# EAGLE board servo_controller (EAGLE 6.4)
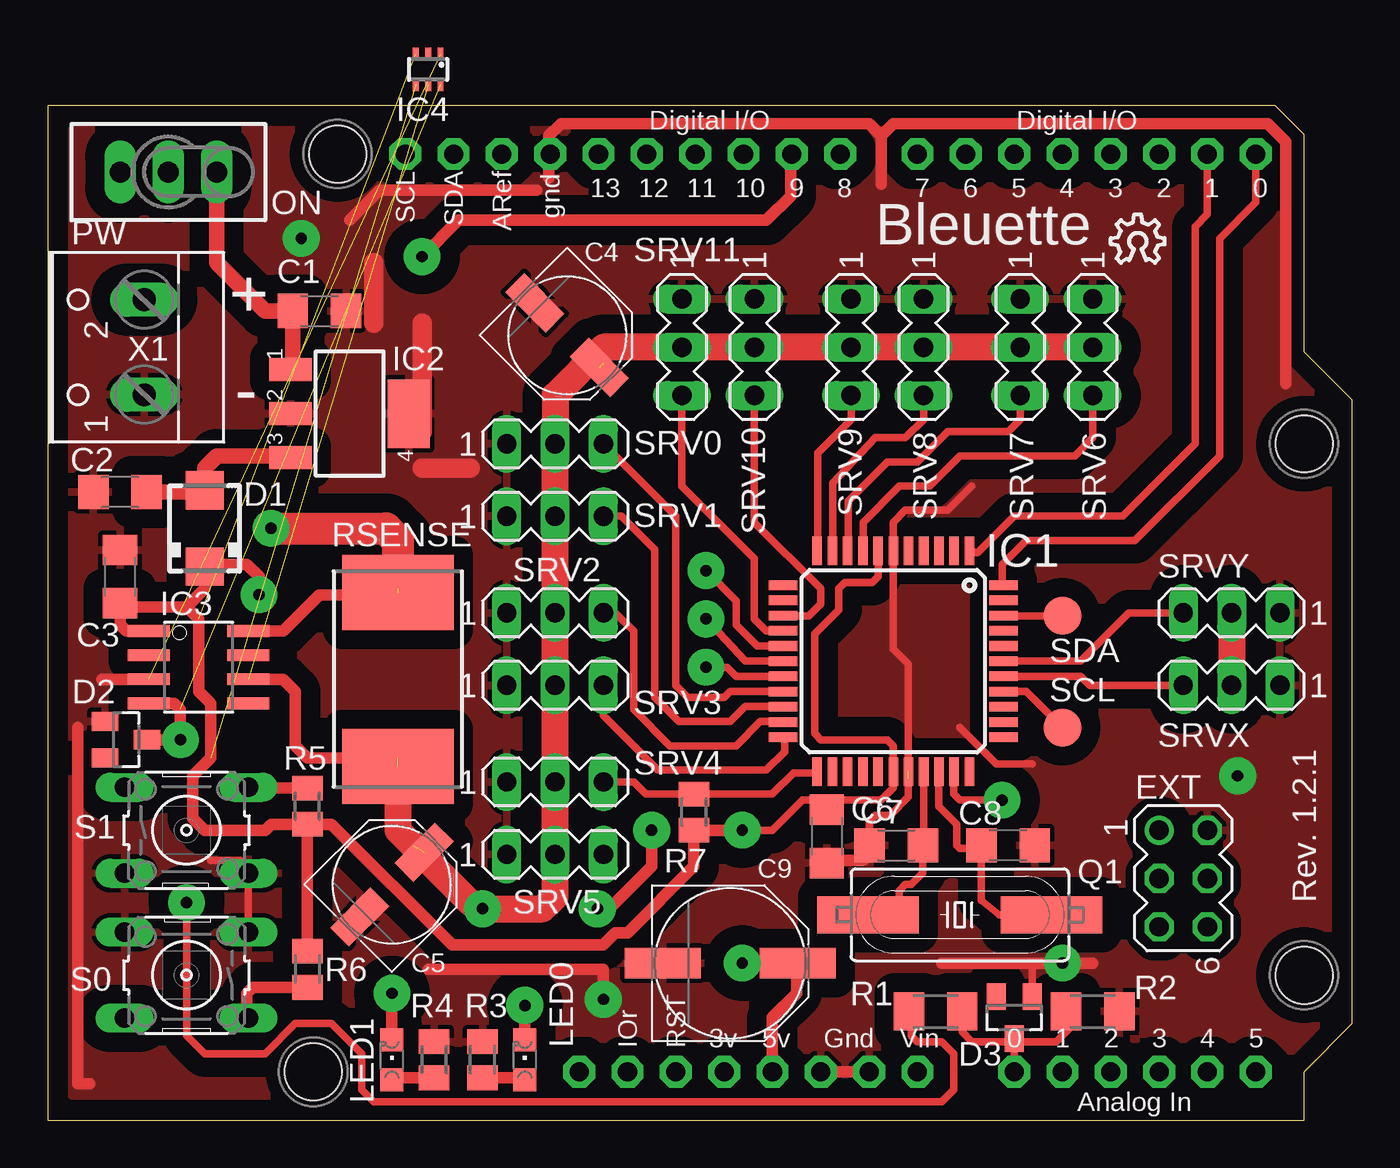
[diagram p0: board, top side]
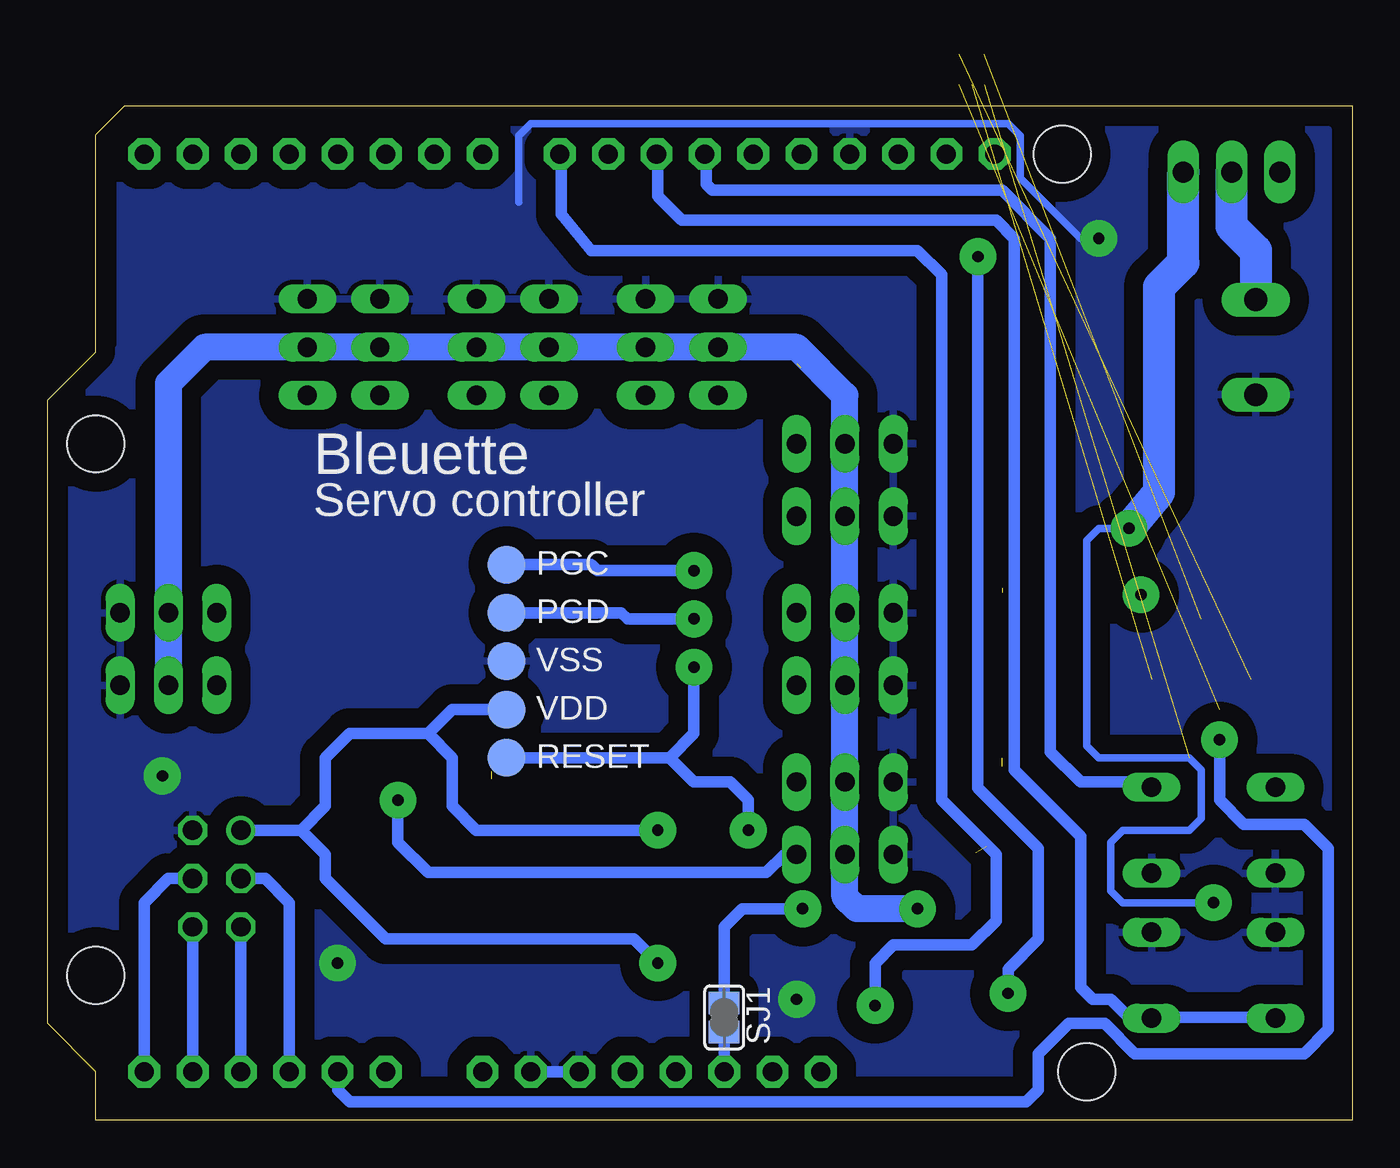
[diagram p1: board, bottom side, seen from below]

Size 68.58 x 53.34 mm. Coordinates in mm from the lower left corner, seen from the top.
Copper layers (1*16): Top 0.035mm / dielectric 1.5mm / Bottom 0.035mm
Design rules "default": minimum track width 6mil, minimum drill 12mil, track to track 6mil, track to pad 6mil, pad to pad 6mil, via to via 6mil, smd to smd 0mil, copper to edge 10mil, drill to drill 10mil, minimum pad ring 10mil, minimum via ring 6mil, stop-mask expansion 2mil, vias tented up to drill 100mil, thermal gap 10mil
Holes 3 mm at 66.04,7.62 66.04,35.56 13.97,2.54 15.24,50.8

## Footprints (pad centres in the part's own frame; a part is rotated, then mirrored left to right if it is on the bottom)
C1206 = smd 1.6 x 1.8: 1 -1.4,0; 2 1.4,0
PANASONIC_D = smd 3 x 1.4: + 2.4,0; - -2.4,0
PANASONIC_F = smd 4 x 1.6: + 3.55,0; - -3.55,0
SMA = smd 2 x 2: A 2,0; C -2,0
SOT23 = smd 1 x 1.4: 1 -0.95,-1.1; 2 0.95,-1.1; 3 0,1.1
MA03-2 = drill 1.016: 1 -2.54,-1.27 | drill 1.016 octagon: 2 -2.54,1.27; 3 0,-1.27; 4 0,1.27; 5 2.54,-1.27; 6 2.54,1.27
TQFP44 = smd 1.5 x 0.5: 1 -5.8,4; 2 -5.8,3.2; 3 -5.8,2.4; 4 -5.8,1.6; 5 -5.8,0.8; 6 -5.8,0; 7 -5.8,-0.8; 8 -5.8,-1.6; 9 -5.8,-2.4; 10 -5.8,-3.2; 11 -5.8,-4; 23 5.8,-4; 24 5.8,-3.2; 25 5.8,-2.4; 26 5.8,-1.6; 27 5.8,-0.8; 28 5.8,0; 29 5.8,0.8; 30 5.8,1.6; 31 5.8,2.4; 32 5.8,3.2; 33 5.8,4 | smd 0.5 x 1.5: 12 -4,-5.8; 13 -3.2,-5.8; 14 -2.4,-5.8; 15 -1.6,-5.8; 16 -0.8,-5.8; 17 0,-5.8; 18 0.8,-5.8; 19 1.6,-5.8; 20 2.4,-5.8; 21 3.2,-5.8; 22 4,-5.8; 34 4,5.8; 35 3.2,5.8; 36 2.4,5.8; 37 1.6,5.8; 38 0.8,5.8; 39 0,5.8; 40 -0.8,5.8; 41 -1.6,5.8; 42 -2.4,5.8; 43 -3.2,5.8; 44 -4,5.8
SOT223 = smd 1.219 x 2.235: 1 -2.311,-3.099; 2 0,-3.099; 3 2.311,-3.099 | smd 3.6 x 2.2: 4 0,3.099
SO08 = smd 0.61 x 2.21: 1 -1.905,-2.616; 2 -0.635,-2.616; 3 0.635,-2.616; 4 1.905,-2.616; 5 1.905,2.616; 6 0.635,2.616; 7 -0.635,2.616; 8 -1.905,2.616
SOT-363 = smd 0.3 x 0.7: 1 -0.65,-0.8; 2 0,-0.8; 3 0.65,-0.8; 4 0.65,0.8; 5 0,0.8; 6 -0.65,0.8
CHIPLED_0805 = smd 1.2 x 1.2: A 0,-1.05; C 0,1.05
TP20R = smd 2 x 2: TP 0,0
TL3XPO = drill 1.1 pad 1.422 long: 1 -2.54,0; 2 0,0; 3 2.54,0
HC49UP = smd 5.334 x 1.93: 1 -4.826,0; 2 4.826,0
M1206 = smd 1.6 x 2: 1 -1.4,0; 2 1.4,0
M0805 = smd 1.3 x 1.6: 1 -0.95,0; 2 0.95,0
R4527 = smd 3.94 x 5.84: 1 -4.575,0; 2 4.575,0
B3F-10XX = drill 1.016 long: 1 -3.251,2.261; 2 3.251,2.261; 3 -3.251,-2.261; 4 3.251,-2.261
SJ = smd 1.168 x 1.6: 1 -0.762,0; 2 0.762,0
MA03-1 = drill 1.016 long: 1 -2.54,0; 2 0,0; 3 2.54,0
ARDUINOR3 = drill 1 pad 1.676 octagon: 3V 35.56,2.54; 5V 38.1,2.54; A0 50.8,2.54; A1 53.34,2.54; A2 55.88,2.54; A3 58.42,2.54; A4 60.96,2.54; A5 63.5,2.54; AREF 23.876,50.8; D0 63.5,50.8; D1 60.96,50.8; D2 58.42,50.8; D3 55.88,50.8; D4 53.34,50.8; D5 50.8,50.8; D6 48.26,50.8; D7 45.72,50.8; D8 41.656,50.8; D9 39.116,50.8; D10 36.576,50.8; D11 34.036,50.8; D12 31.496,50.8; D13 28.956,50.8; GND 26.416,50.8; GND1 43.18,2.54; GND2 40.64,2.54; IOREF 30.48,2.54; RESERVED 27.94,2.54; RESET 33.02,2.54; SCL 18.796,50.8; SDA 21.336,50.8; VIN 45.72,2.54
W237-102 = drill 1.194 long: 1 -2.5,-1.27; 2 2.5,-1.27

## Placement (x,y rotation side)
C1  100nf  [C1206]  14.29,42.55 0 top
C2  10uf  [C1206]  3.81,33.02 180 top
C3  100nf  [C1206]  3.81,28.57 90 top
C4  [PANASONIC_D]  27.3,41.27 315 top
C5  [PANASONIC_D]  18.1,12.38 45 top
C6  100nf  [C1206]  40.96,14.92 270 top
C7  22pf  [C1206]  44.61,14.45 0 top
C8  22pf  [C1206]  50.48,14.45 180 top
C9  [PANASONIC_F]  35.88,8.26 0 top
D1  MBRA340T3  [SMA]  8.26,31.11 90 top
D2  5v1  [SOT23]  4.13,20 270 top
D3  5v1  [SOT23]  50.8,5.4 180 top
EXT  [MA03-2]  59.69,12.7 270 top
IC1  PIC18F452  [TQFP44]  44.45,24.13 270 top
IC2  LM2936MP-3.0  [SOT223]  15.88,37.15 270 top
IC3  [SO08]  7.94,23.81 270 top
IC4  [SOT-363]  20,55.24 180 top
LED0  [CHIPLED_0805]  25.08,3.17 0 top
LED1  [CHIPLED_0805]  18.1,3.17 0 top
PGC  TPTP20R  [TP20R]  44.45,29.21 270 bottom
PGD  TPTP20R  [TP20R]  44.45,26.67 270 bottom
PW  TL36PO  [TL3XPO]  6.35,49.85 180 top
Q1  10Mhz  [HC49UP]  47.94,10.79 180 top
R1  3.3k  [M1206]  46.67,5.71 180 top
R2  10k  [M1206]  54.93,5.71 180 top
R3  1k  [M0805]  22.86,3.17 270 top
R4  1k  [M0805]  20.32,3.17 270 top
R5  2.2k  [M0805]  13.65,16.51 270 top
R6  2.2k  [M0805]  13.65,7.94 90 top
R7  2.2k  [M0805]  33.97,16.19 270 top
RESET  TPTP20R  [TP20R]  44.45,19.05 270 bottom
RSENSE  0.02  [R4527]  18.41,23.18 270 top
S0  [B3F-10XX]  7.3,7.62 180 top
S1  [B3F-10XX]  7.3,15.24 0 top
SCL  TPTP20R  [TP20R]  53.34,20.64 0 top
SDA  TPTP20R  [TP20R]  53.34,26.51 0 top
SJ1  [SJ]  33.02,5.4 270 bottom
SRV0  [MA03-1]  26.67,35.56 0 top
SRV1  [MA03-1]  26.67,31.75 0 top
SRV2  [MA03-1]  26.67,26.67 0 top
SRV3  [MA03-1]  26.67,22.86 0 top
SRV4  [MA03-1]  26.67,17.78 0 top
SRV5  [MA03-1]  26.67,13.97 0 top
SRV6  [MA03-1]  54.93,40.64 270 top
SRV7  [MA03-1]  51.12,40.64 270 top
SRV8  [MA03-1]  46.04,40.64 270 top
SRV9  [MA03-1]  42.23,40.64 270 top
SRV10  [MA03-1]  37.15,40.64 270 top
SRV11  [MA03-1]  33.34,40.64 270 top
SRVX  [MA03-1]  62.23,22.86 180 top
SRVY  [MA03-1]  62.23,26.67 180 top
U1  ARDUINOR3-DIMENSION  [ARDUINOR3]  0,0 0 top
U$1  [OSHW_8X100_NOTEXT]  55.88,45.09 0 top
VDD  TPTP20R  [TP20R]  44.45,21.59 270 bottom
VSS  TPTP20R  [TP20R]  44.45,24.13 270 bottom
X1  [W237-102]  3.81,40.64 90 top

## Library data of the parts
C1-C9 R1-R7 RSENSE = rcl
D1-D3 = diode
EXT = con-lstb; OC_FARNELL: unknown; OC_NEWARK: unknown
IC1 = microchip; MF: MICROCHIP; MPN: PIC16F877-04/PQ; OC_FARNELL: 9761411; OC_NEWARK: 23C5094
IC2 = national-semiconductor; MF: NATIONAL SEMICONDUCTOR; MPN: LM2936MP-3.0/NOPB; OC_FARNELL: 1496125; OC_NEWARK: 41K4522
IC3 IC4 = AWJLEagleLib
LED0 LED1 = led
PGC PGD RESET SCL SDA VDD VSS = testpad
PW = switch
Q1 = crystal
S0 S1 = switch-omron; MPN: B3F-1000; OC_FARNELL: 176432; OC_NEWARK: 36M3542
SJ1 = jumper
SRV0 SRV1-SRV11 SRVX SRVY = con-lstb
U1 = adafruit
U$1 = ohw-logo
X1 = con-wago-500; MPN: 237-102; OC_FARNELL: unknown; OC_NEWARK: 70K9898

## Nets
3V: U1.3V
+5V: C3.1 C6.1 C9.+ D1.C EXT.1 IC1.7 IC1.28 IC3.1 IC4.3 R5.2 R6.2 R7.2 U1.5V VDD.TP
LED0: LED0.C U1.D8
LED1: LED1.C U1.D9
LIPO_VOLTAGE: D3.3 R1.1 R2.2 U1.A0
N$1: IC1.19 SRV0.3
N$2: IC1.20 SRV1.3
N$3: IC1.21 SRV2.3
N$4: IC1.22 SRV3.3
N$5: IC1.23 R7.1 SRV4.3
N$6: IC1.32 SRV5.3
N$7: LED0.A R3.2
N$8: LED1.A R4.2
N$9: IC1.42 SDA.TP
N$10: IC1.8 SRV6.3
N$11: IC1.9 SRV7.3
N$12: IC1.10 SRV8.3
N$13: IC1.11 SRV9.3
N$14: IC1.14 SRV10.3
N$15: PW.2 X1.2
N$16: SJ1.2 U1.RESET
N$18: IC1.37 SCL.TP
N$19: IC1.38 SRVX.3
N$20: C2.1 D1.A IC2.3
N$22: IC1.17 PGD.TP
N$23: IC1.16 PGC.TP
N$24: IC1.39 SRVY.3
N$25: C8.2 IC1.31 Q1.1
N$27: C7.2 IC1.30 Q1.2
N$32: IC1.15 SRV11.3
OPTION0: EXT.3 U1.A2
OPTION1: EXT.5 U1.A3
OPTION2: EXT.6 U1.A4
OPTION3: EXT.4 U1.A5
RX_FROM_ARDUINO: IC1.44 U1.D0
SERVO_CURRENT: D2.3 IC3.4 IC4.6 U1.A1
SWITCH0: R6.1 S0.1 U1.D10
SWITCH1: R5.1 S1.2 U1.D11
TX_FROM_ARDUINO: IC1.1 U1.D1
UC_RESET: IC1.18 RESET.TP SJ1.1
VDD: C1.1 IC2.1 IC3.8 IC4.4 PW.1 R1.2 RSENSE.1
VEE: C4.+ C5.+ IC3.6 IC4.5 RSENSE.2 SRV0.2 SRV1.2 SRV2.2 SRV3.2 SRV4.2 SRV5.2 SRV6.2 SRV7.2 SRV8.2 SRV9.2 SRV10.2 SRV11.2 SRVX.2 SRVY.2
VIN: U1.VIN
VSS: C1.2 C2.2 C3.2 C4.- C5.- C6.2 C7.1 C8.1 C9.- D2.1 D3.1 EXT.2 IC1.6 IC1.29 IC2.2 IC2.4 IC3.3 IC4.1 R2.1 R3.1 R4.1 S0.3 S0.4 S1.3 S1.4 SRV0.1 SRV1.1 SRV2.1 SRV3.1 SRV4.1 SRV5.1 SRV6.1 SRV7.1 SRV8.1 SRV9.1 SRV10.1 SRV11.1 SRVX.1 SRVY.1 U1.GND U1.GND1 U1.GND2 VSS.TP X1.1

## Tracks (layer width: path | path; a pad name or v marks a point on that pad's centre or on a via)
+5V  (via drill 0.6 pad 1.93)  (1 unrouted)
  Top 0.406: 40.96,16.83 39.69,16.83 38.1,15.24 v36.51,15.24 | 40.96,16.83 43.81,16.83 44.45,17.46 IC1.28 44.45,19.68 44.13,20 40.64,20 40.32,20.32 40.32,25.56 41.59,26.83 41.59,27.94 41.91,28.26 43.34,28.26 43.66,28.57 IC1.7 | R7.2 | C6.1 40.96,16.83
  Top 0.61: R5.2 R6.2 | 7.3,26.99 8.26,27.94 D1.C 8.35,29.21 10.48,29.21 11.11,28.57 v11.11,27.62 | 7.3,26.99 4.45,26.99 | 4.45,26.99 C3.1 | 4.45,26.99 3.81,26.99 3.81,26.04 4.13,25.72 IC3.1 | R5.2 11.75,15.56 11.43,15.24 8.26,15.24 7.62,15.88 7.62,18.1 8.57,19.05 8.57,21.91 7.94,22.54 7.94,26.35 7.3,26.99 | R5.2 13.34,15.56 14.92,15.56 21.27,9.21 29.21,9.21 29.84,9.84 30.48,9.84 33.97,13.34 R7.2 | 38.73,8.26 C9.+ v36.51,8.26 | 38.73,8.26 38.42,8.57 | 38.73,8.26 39.37,7.94 39.37,6.67 38.1,5.4 U1.5V | R7.2 v36.51,15.24
  Bottom 0.61: 55.24,15.24 53.98,13.97 53.98,12.7 50.8,9.53 37.78,9.53 v36.51,8.26 | EXT.1 55.24,15.24 | 55.24,15.24 53.98,16.51 53.98,19.05 52.7,20.32 48.58,20.32 | 48.58,20.32 47.31,19.05 47.31,16.51 46.04,15.24 v36.51,15.24 | 48.58,20.32 47.31,21.59 VDD.TP
LED0  (via drill 0.6 pad 1.93)
  Top 0.61: v25.08,6.03 LED0.C
  Bottom 0.406: U1.D8 41.59,50.8
  Bottom 0.61: 41.59,50.8 41.59,47.62 40.01,45.72 22.86,45.72 21.59,44.45 21.59,16.83 18.73,13.97 18.73,10.48 20,9.21 24.13,9.21 25.08,8.26 v25.08,6.03
LED1  (via drill 0.6 pad 1.93)
  Top 0.61: LED1.C v18.1,6.67 | v19.68,45.4 21.59,47.31 37.78,47.31 39.05,48.58 39.05,50.74 U1.D9
  Bottom 0.406: U1.D9 39.05,50.8
  Bottom 0.61: v19.68,45.4 19.68,17.46 16.51,14.29 16.51,9.53 18.1,7.94 v18.1,6.67
LIPO_VOLTAGE
  Top 0.406: 53.02,5.71 R2.2 53.66,5.58 53.66,4.76 53.02,4.13 50.97,4.13 D3.3 | U1.A0 D3.3 | 47.94,5.58 R1.1 48.07,4.63 48.58,4.13 50.63,4.13 D3.3
N$1
  Top 0.406: SRV0.3 33.02,31.75 33.02,22.86 33.66,22.23 35.56,22.23 35.88,22.54 38.64,22.54 IC1.19
N$2
  Top 0.406: SRV1.3 30.16,31.75 31.91,30 31.91,22.23 33.18,20.95 35.88,20.95 36.67,21.75 38.63,21.75 IC1.20
N$3
  Top 0.406: SRV2.3 29.84,26.67 30.8,25.72 30.8,21.59 32.7,19.68 36.2,19.68 37.47,20.95 38.62,20.95 IC1.21
N$4
  Top 0.406: 38.62,20.16 IC1.22 38.73,20.05 38.73,19.37 37.78,18.41 32.07,18.41 29.21,21.27 SRV3.3
N$5
  Top 0.406: SRV4.3 30.8,17.78 31.43,17.14 | 31.43,17.14 38.1,17.14 39.21,18.26 40.38,18.26 IC1.23 | R7.1 31.43,17.14
N$6  (via drill 0.6 pad 1.93)
  Top 0.406: IC1.32 47.62,17.94 47.62,17.14 47.94,16.83 v50.16,16.83
  Bottom 0.61: SRV5.3 29.84,13.97 30.8,13.02 48.58,13.02 50.16,14.61 v50.16,16.83
N$7
  Top 0.61: LED0.A 25.08,2.22 R3.2
N$8
  Top 0.61: LED1.A 18.1,2.22 R4.2
N$9
  Top 0.406: IC1.42 50.64,26.51 SDA.TP
N$10
  Top 0.406: IC1.8 42.86,29.94 42.86,31.43 44.77,33.34 46.35,33.34 47.94,34.92 53.98,34.92 54.93,35.88 SRV6.3
N$11
  Top 0.406: SRV7.3 51.12,36.83 50.48,36.2 47.31,36.2 45.72,34.61 44.13,34.61 42.07,32.54 42.07,29.95 IC1.9
N$12
  Top 0.406: SRV8.3 46.04,36.83 45.09,35.88 43.5,35.88 41.27,33.5 41.27,29.95 IC1.10
N$13
  Top 0.406: SRV9.3 42.23,36.83 40.48,35.08 40.48,29.96 IC1.11
N$14
  Top 0.406: SRV10.3 37.15,31.43 40.64,27.94 40.64,27.15 40.01,26.51 38.67,26.51 IC1.14
N$15
  Bottom 1.676: X1.2 5.08,45.72 6.35,46.99 PW.2
N$16
  Bottom 0.61: U1.RESET SJ1.2
N$18
  Top 0.406: IC1.37 50.64,22.54 51.44,22.54 SCL.TP
N$19
  Top 0.406: IC1.38 50.64,23.34 54.29,23.34 54.77,22.86 SRVX.3
N$20
  Top 0.813: C2.1 8.26,33.02 D1.A 8.26,34.29 8.89,34.92 12.37,34.92 IC2.3
N$21
  Bottom 0.61: 4.13,5.4 10.48,5.4
N$22  (via drill 0.6 pad 1.93)
  Top 0.406: IC1.17 36.67,24.13 v34.61,26.35
  Bottom 0.61: PGD.TP 38.42,26.67 38.1,26.35 v34.61,26.35
N$23  (via drill 0.6 pad 1.93)
  Top 0.406: IC1.16 37.3,24.93 36.2,26.04 36.2,27.3 v34.61,28.89
  Bottom 0.406: 40.01,29.21 39.85,29.21 39.53,28.89 v34.61,28.89
  Bottom 0.61: v34.61,28.89 39.69,28.89 40.01,29.21 PGC.TP
N$24
  Top 0.406: IC1.39 54.29,24.13 56.83,26.67 SRVY.3
N$25
  Top 0.406: IC1.31 46.85,16.49 47.78,15.56 47.78,14.45 47.94,14.29 48.9,14.29 C8.2 49.08,11.56 50.01,10.79 Q1.1
N$27
  Top 0.406: IC1.30 46.05,17.66 46.04,18.26 46.04,14.61 46.01,14.58 C7.2 46.01,12.99 45.4,12.38 45.09,12.38 44.77,12.06 44.77,10.79 45.09,10.48 45.06,11.08 44.45,10.48 Q1.2
N$32
  Top 0.406: IC1.15 38.64,25.72 37.78,25.72 37.15,26.35 37.15,29.53 33.34,33.34 SRV11.3
OPTION0
  Bottom 0.61: EXT.3 57.15,12.7 55.88,11.43 U1.A2
OPTION1
  Bottom 0.61: EXT.5 U1.A3
OPTION2
  Bottom 0.61: EXT.6 U1.A4
OPTION3
  Bottom 0.61: EXT.4 62.23,12.7 63.5,11.43 U1.A5
RX_FROM_ARDUINO
  Top 0.406: 50.16,28.26 IC1.44 50.16,28.21 50.16,29.21 51.44,30.48 57.15,30.48 61.59,34.92 61.59,46.35 63.5,48.26 U1.D0
SERVO_CURRENT  (via drill 0.6 pad 1.93)  (1 unrouted)
  Top 0.61: IC3.4 6.67,21.91 6.99,21.59 v6.99,20 D2.3
  Bottom 0.61: U1.A1 53.34,1.59 52.7,0.95 17.14,0.95 16.51,1.59 16.51,3.49 14.92,5.08 13.02,5.08 11.43,3.49 2.54,3.49 1.27,4.76 1.27,14.29 2.54,15.56 5.71,15.56 6.99,16.83 v6.99,20
SWITCH0
  Top 0.61: R6.1 11.12,6.99 11.11,6.99 10.79,6.99 10.48,6.67 10.48,5.44 S0.1
  Bottom 0.406: U1.D10 36.51,50.8
  Bottom 0.61: 36.51,50.8 36.51,48.58 35.24,47.31 18.73,47.31 17.78,46.35 17.78,18.41 14.29,14.92 14.29,6.99 13.65,6.35 12.7,6.35 11.75,5.4 10.48,5.4 10.48,5.44 S0.1
SWITCH1
  Top 0.61: R5.1 13.65,17.14 13.34,17.46 10.59,17.46 S1.2
  Bottom 0.406: U1.D11 33.97,50.8 | 33.97,49.53 33.66,48.9
  Bottom 0.61: 33.97,50.8 33.97,49.53 33.97,49.21 33.66,48.9 18.41,48.9 15.88,46.35 15.88,19.37 14.29,17.78 10.59,17.78 S1.2
TX_FROM_ARDUINO
  Top 0.406: IC1.1 48.42,30.32 | 48.9,29.84 IC1.1 | U1.D1 60.96,47.62 60.33,46.99 60.33,35.56 56.52,31.75 50.8,31.75 48.9,29.84 | 48.9,29.84 48.53,29.84 IC1.1
UC_RESET  (via drill 0.6 pad 1.93)
  Top 0.406: IC1.18 38.58,23.34 36.2,23.34 35.73,23.81 35.25,23.81 v34.61,23.81
  Top 0.61: v31.75,15.24 31.75,13.97 31.75,13.34 29.53,11.11 v28.89,11.11
  Bottom 0.61: v31.75,15.24 31.75,16.83 32.7,17.78 34.61,17.78 35.88,19.05 | 35.88,19.05 34.61,20.32 v34.61,23.81 | 35.88,19.05 RESET.TP | v28.89,11.11 32.07,11.11 33.02,10.16 SJ1.1
VDD  (via drill 0.6 pad 1.93)  (2 unrouted)
  Top 0.406: IC3.8 11.11,25.72 | v7.3,11.43 7.3,4.45 8.26,3.49 11.43,3.49 13.02,5.08 14.92,5.08 16.51,3.49 16.51,1.59 17.14,0.95 46.99,0.95 47.62,1.59 47.62,3.49 46.99,4.13 45.72,4.13 45.4,4.45 45.4,5.27 R1.2
  Top 0.61: 11.11,25.72 12.38,25.72 14.29,27.62 18.05,27.62
  Top 0.813: IC2.1 12.89,39.57 C1.1 11.43,42.55 8.89,45.09 PW.1
  Top 1.676: v11.75,31.11 17.78,31.11 18.41,30.48 18.41,27.99 18.05,27.62
  Bottom 0.406: v11.75,31.11 13.34,31.11 13.97,30.48 13.97,19.68 13.34,19.05 8.57,19.05 7.94,18.41 7.94,15.88 8.57,15.24 12.06,15.24 12.7,14.61 12.7,12.06 12.06,11.43 v7.3,11.43
  Bottom 1.676: v11.75,31.11 10.16,33.02 10.16,43.81 8.89,45.09 PW.1
VEE  (via drill 0.6 pad 1.93)  (4 unrouted)
  Top 0.406: IC3.6 11.11,23.18 | 18.1,19.05 18.41,19.05 | 19.26,14.4 18.41,15.24
  Top 0.61: 11.11,23.18 12.38,23.18 13.02,22.54 13.02,19.68 13.65,19.05 18.1,19.05 | 29.21,40.64 29.21,39.79
  Top 1.422: SRV6.2 SRV11.2 29.21,40.64 26.67,38.1 SRV0.2 SRV5.2 26.67,11.75 26.04,11.11 v22.86,11.11 22.23,11.43 18.41,15.24 18.41,19.05 | SRVY.2 SRVX.2
  Bottom 1.422: SRVX.2 62.23,38.73 60.33,40.64 SRV6.2 SRV7.2 SRV8.2 SRV9.2 SRV10.2 SRV11.2 29.21,40.64 26.67,38.1 SRV0.2 SRV1.2 SRV2.2 SRV3.2 SRV4.2 SRV5.2 26.67,11.75 26.04,11.11 v22.86,11.11
VSS  (via drill 0.6 pad 1.93)  (2 unrouted)
  Top 0.406: IC1.29 45.24,23.97 44.45,24.77 IC1.6 44.45,31.43 45.09,32.07 47.31,32.07 48.58,33.34 | 51.75,18.73 49.85,18.73 47.94,20.64 | 8.57,13.65 10.16,13.65 10.48,13.34 10.48,13.06 S1.4 | 45.24,17.94 45.24,16.99 44.29,16.03 43.5,16.03 43.18,15.72 43.18,14.45 | S0.3 10.55,12.94 10.48,13.02 | 51.75,8.26 D3.1
  Top 0.61: IC3.3 2.86,23.18 | 25.72,48.9 17.46,48.9 15.88,47.31 | 43.81,49.21 43.81,51.75 | 43.81,51.75 43.18,52.39 26.99,52.39 26.35,51.75 26.35,49.53 | 43.81,51.75 44.45,52.39 64.14,52.39 65.09,51.44 65.09,38.73 | 20,7.94 29.21,7.94 v29.21,6.35 | 1.59,20.64 1.59,1.91 2.22,1.91 | U1.GND2 U1.GND1 | 46.99,8.26 51.75,8.26 54.93,8.26 | 43.18,14.45 43.18,13.97 42.86,13.65 41.09,13.65 C6.2
  Top 1.016: 19.68,34.29 22.23,34.29 | 17.14,41.91 17.14,45.09 | 19.68,36.2 19.68,41.91
  Bottom 0.406: 43.81,48.26 43.81,51.75 43.18,52.39 18.1,52.39 17.46,51.75 17.46,49.53 14.29,46.35
  Bottom 0.61: U1.GND2 U1.GND1
  other vias: 13.34,46.35 62.55,18.1 53.34,8.26
  pour Top (isolate 1.016): 1.27,52.07 63.5,52.07 64.77,50.8 64.77,40.64 67.31,38.1 67.31,5.08 66.04,3.81 64.77,2.54 64.77,1.27 1.27,1.27
  pour Bottom (isolate 1.016): 1.27,52.07 63.5,52.07 64.77,50.8 64.77,40.64 67.31,38.1 67.31,5.08 64.77,2.54 64.77,1.27 1.27,1.27

## Text on the board
tNames: ON | Bleuette | + | - | Rev. 1.2.1
bNames: Bleuette | Servo controller